# Altium PCB Boost convertor.PcbDoc
Units mil, origin at the board's own origin, x right, y up, seen from the top; angles counter-clockwise.
Board outline 1645 x 1100 mil, 2 copper layers (Top Layer, Bottom Layer); 7 components, 4 nets, 15 pads, 0 vias.
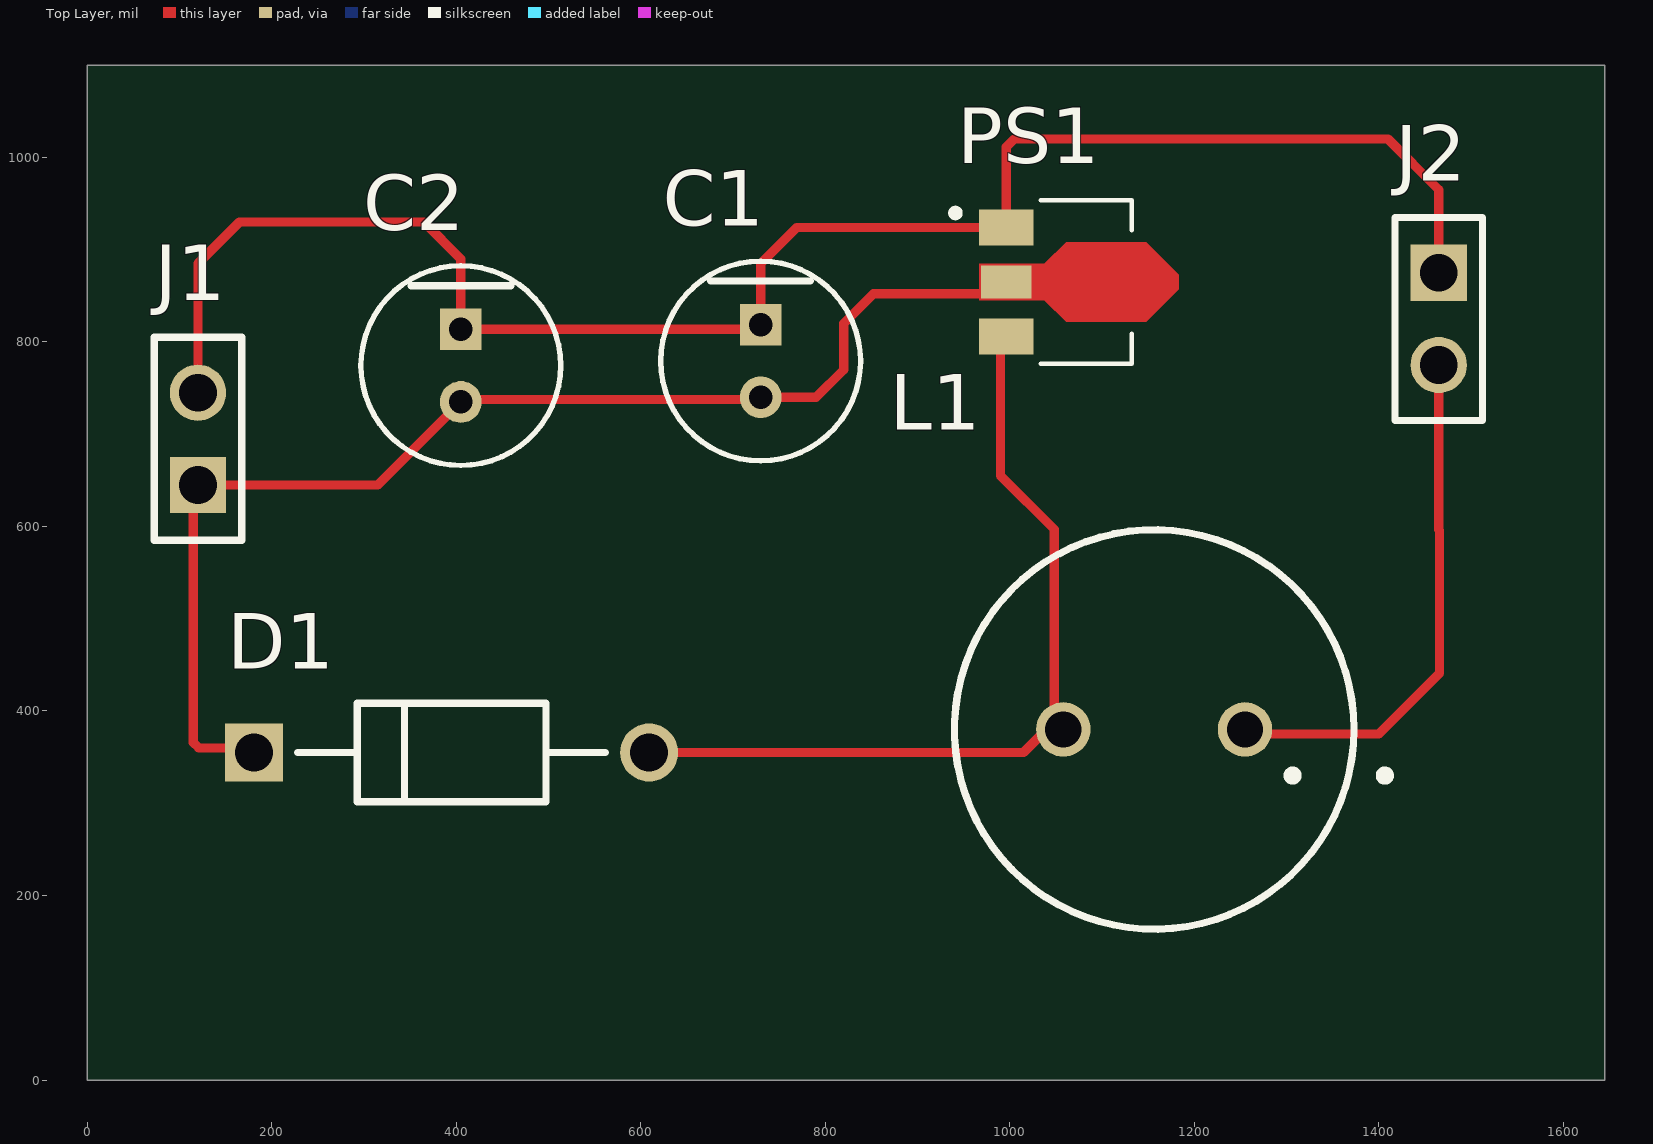
[diagram p0: Top Layer view]
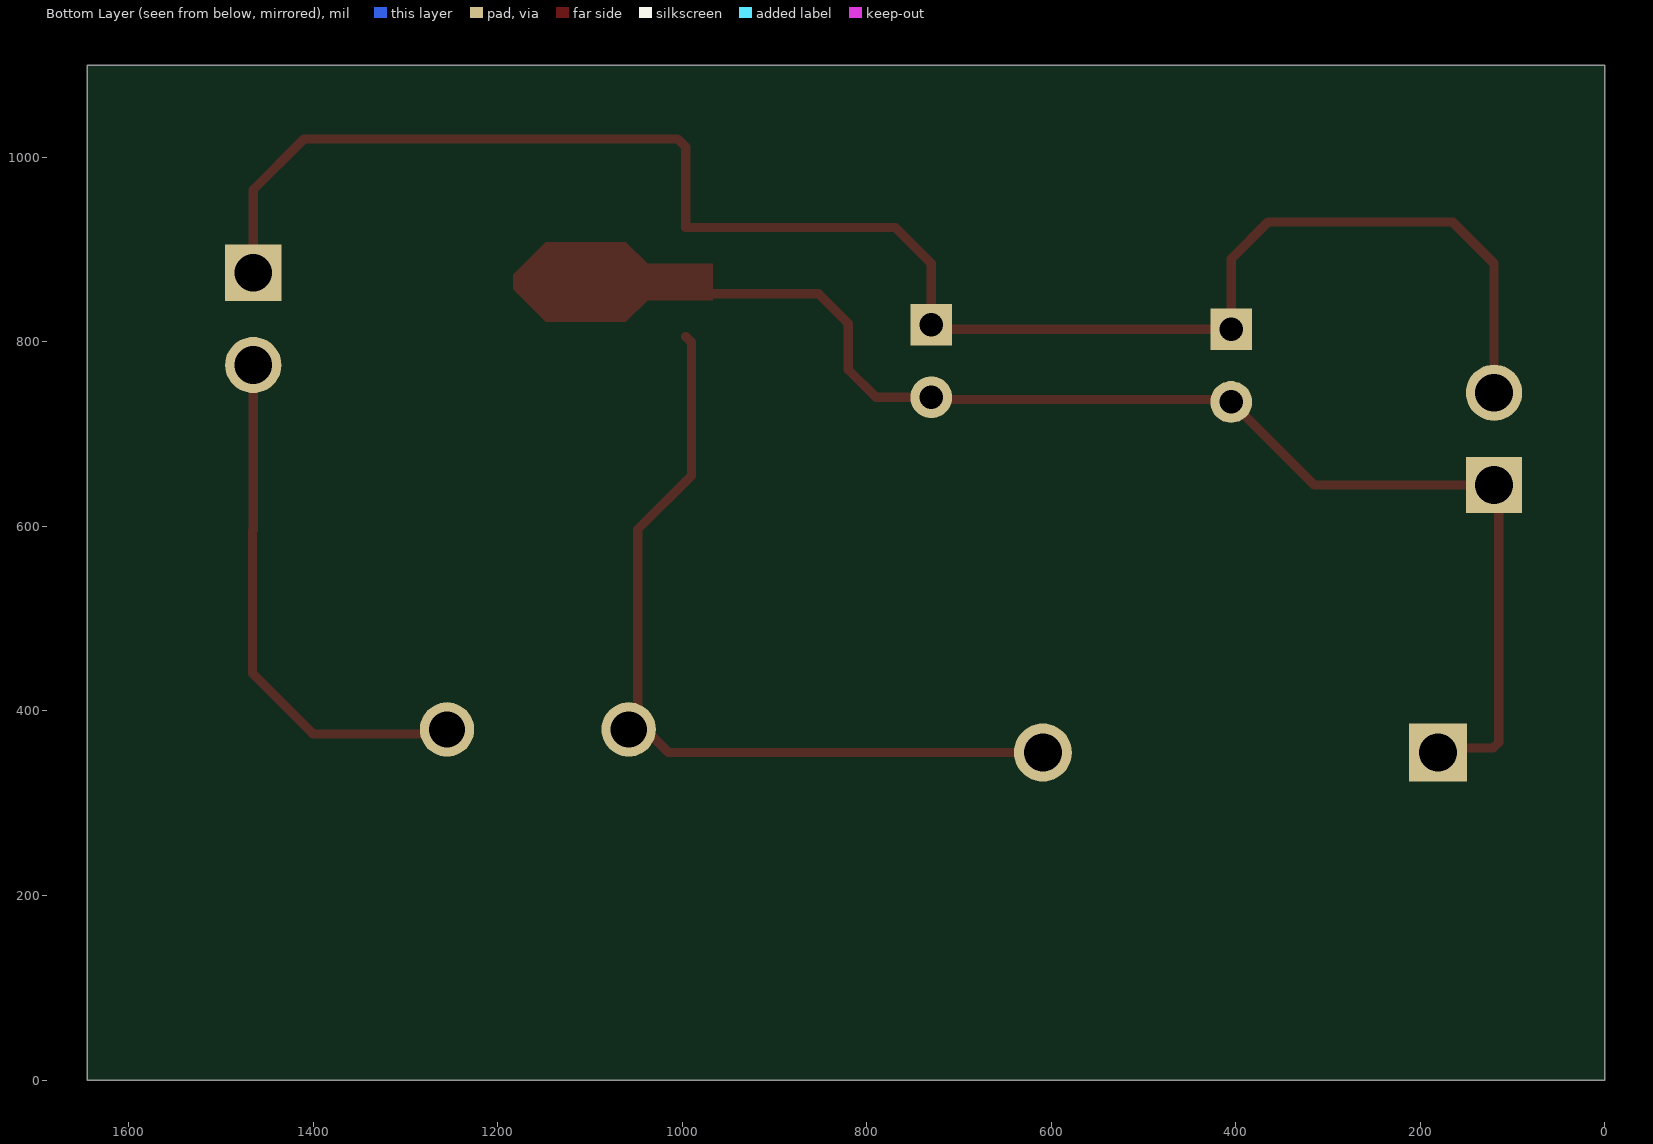
[diagram p1: Bottom Layer view, seen from below]
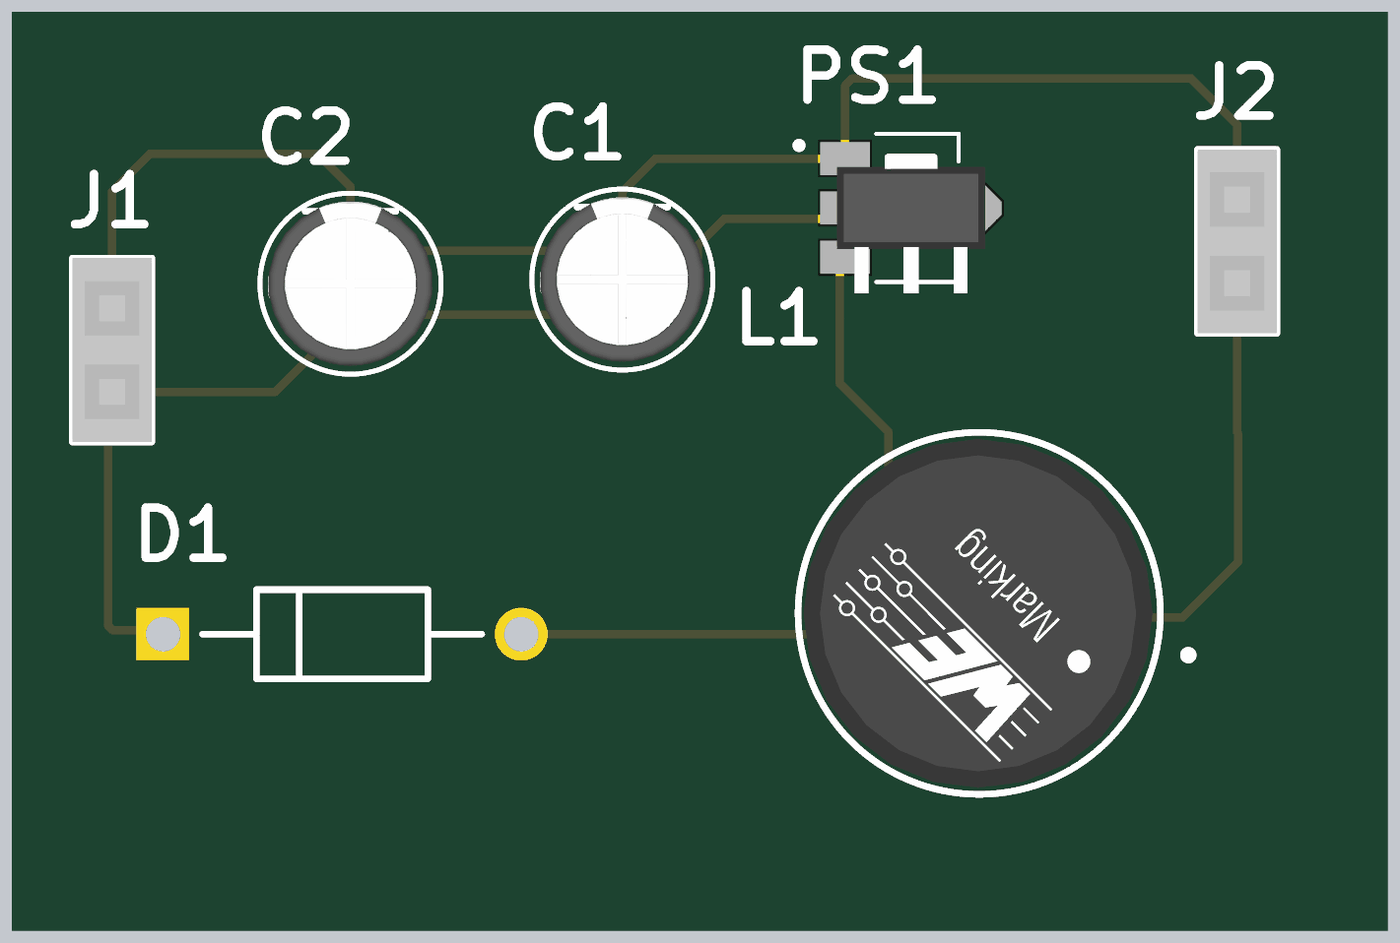
[diagram p2: 3D render of the assembled board from above, using the file's embedded part models]

## Layer stack, top to bottom
Top Solder: solder mask 0.4, Solder Resist, Dk 3.5
Top Layer: signal copper 1.4
Dielectric 1: dielectric 12.6, FR-4, Dk 4.8
Bottom Layer: signal copper 1.4
Bottom Solder: solder mask 0.4, Solder Resist, Dk 3.5

## Board outline
0,0 1645,0 1645,1100 0,1100

## Design rules (kind name [scope] priority, off if disabled: settings)
Clearance [All] p1: gap=10 ignorepadtopadclearanceinfootprint=FALSE except(0: Arc-Hole Track-Hole SMDPad-Hole THPad-Hole Via-Hole Fill-Hole Poly-Hole Region-Hole Text-Hole)
PolygonConnect [All] p1: connectstyle=Relief reliefconductorwidth=10 reliefentries=4 polygonreliefangle="90 Angle" airgapwidth=10
RoutingVias [All] p1: holewidth=28 width=50 viastyle="Through Hole" minholewidth=28 minwidth=50 maxholewidth=28 maxwidth=50
SolderMaskExpansion [All] p1: expansion=4 istentingtop=FALSE
Width [All] p1: maxlimit=10 minlimit=10 preferedwidth=10
30 further rules are at their usual default settings.

## Components (designator, comment, footprint, x,y, rotation, side; value= is the part's Value field where it differs from the comment)
C1 "12uF" FP-RAD-TH-D_5_0_5-L_7_1-F-MFG 730,779.37 r270 top
C2 "12uF" FP-RAD-TH-D_5_0_5-L_7_1-F-MFG 405,774.37 r270 top
D1 "Schottky Diode" FP-DO-41-MFG 395,355 r0 top
J1 "SSW-102-02-T-S" SMTC-SSW-102-02-X-S 120,645 r90 top
J2 "SSW-102-02-T-S" SMTC-SSW-102-02-X-S 1465,875 r270 top
L1 "22uH" "WE-TIS 1111" 1156.57,380 r180 top
PS1 "ME2108A33P" CONV_ME2108A33P 1075,865 r0 top

## Footprints (in the part's own frame and the unit in brackets; to place one, negate y for a bottom-side part, rotate by r counter-clockwise, add the part's x,y. Pads: shape width x height; smd on the part's side, far side on the other; paste and mask are expansions set on the pad)
CONV_ME2108A33P [mm]
  rect 1.5x1 smd mask+0: 1(-2,1.5) 3(-2,-1.5)
  rect 1.4x0.9 smd paste-2 mask+0: 2(-2,0)
  Top Layer region: 2.75,0.2 2.75,-0.2 1.85,-1.1 -0.35,-1.1 -0.95,-0.5 -2.75,-0.5 -2.75,0.5 -0.95,0.5 -0.35,1.1 1.85,1.1
  silkscreen extent -3.5,-2.25 1.45,2.25, body extent -2.25,-2.6 2.25,1.65, height 1.6
FP-DO-41-MFG [mm]
  rect 1.6x1.6 hole 1.05 paste-1000 mask+0: 1(-5.438,0)
  round 1.6 hole 1.05 paste-1000 mask+0: 2(5.438,0)
  silkscreen extent -4.24,-1.36 4.24,1.36
FP-RAD-TH-D_5_0_5-L_7_1-F-MFG [mm]
  rect 1.15x1.15 hole 0.65 paste-1000 mask+0: 1(-1,0)
  round 1.15 hole 0.65 paste-1000 mask+0: 2(1,0)
  silkscreen extent -2.75,-2.75 2.75,2.75, body extent -2.85,-2.85 2.85,2.85, height 0.25
SMTC-SSW-102-02-X-S [mm] "SQ Post Socket, 1x2 Pins, Vertical, 2.54mm Pitch, Female"
  rect 1.55x1.55 hole 1.04: 1(0,0)
  round 1.55 hole 1.04: 2(2.54,0)
  silkscreen extent -1.53,-1.2 4.07,1.2, body extent -1.52,-1.21 4.06,1.21, height 8.51
"WE-TIS 1111" [mm] "THT, 2-Leads, Body 11,0x11,0mm, Pitch 5mm"
  round 1.5 hole 1: 1(-2.5,0) 2(2.5,0)
  silkscreen extent -6.48,-5.5 5.5,5.5, body extent -7.46,-7.5 7.53,7.5, height 10.5

## Part data
C1 C2: library part CMP-05427-000166-1, "Aluminum Electrolytic Capacitors (Radial Lead Type) AEC-Q200 Qualified 12uF ±20% 35V", Case/Package=Radial, ESR (Equivalent Series Resistance)=950mR, Leakage Current=3uA, Max Operating Temperature=105°C, Min Operating Temperature=-55°C, Package Quantity=200, Ripple Current=120mA, Tolerance=20%, Voltage=35V, Capacitance=12uF, Construction=RADIAL, Diameter=5mm, Height=7mm, Height - Seated (Max)=0.315inch, Impedance=950mR, Lead Diameter=0.45mm, Lead Pitch=2mm, Length=7mm, Life (Hours)=1000Hour, Mount="Through Hole", Packaging=Bulk, Radiation Hardening=No, RoHS Compliant=Yes, Series=FC, Termination=Radial, Voltage Rating=35V, Voltage Rating (DC)=35V
D1: library part CMP-12187-000037-1, "DIODE SCHOTTKY 20V 1A DO41", Average Rectified Current=1A, Capacitance=110pF, Case/Package=DO-41, Forward Voltage=450mV, Max Forward Surge Current (Ifsm)=25A, Max Operating Temperature=150°C, Max Repetitive Reverse Voltage (Vrrm)=20V, Max Reverse Current=500uA, Min Operating Temperature=-65°C, Package Quantity=2000, Current Rating=1A, Element Configuration=Single, Forward Current=1A, Height=2.7mm, Lead Free="Lead Free", Length=5.2mm, Max Reverse Leakage Current=500uA, Max Reverse Voltage (DC)=20V, Max Surge Current=25A, Mount="Through Hole", Number of Pins=2, Output Current=1A, Packaging="Cut Tape", Peak Non-Repetitive Surge Current=25A, Polarity=Standard, Radiation Hardening=No, REACH SVHC="No SVHC", RoHS Compliant=Yes, Series=-, Voltage Rating (DC)=20V, Weight=0.01lb, Width=2.7mm
J1 J2: library part CMP-1023-00323-1, "SQ Post Socket, Through-hole, Vertical, -55 to 105 degC, 2.54 mm Pitch, 2-Pin, Female, RoHS", Manufacturer=Samtec, Temperature Range="-55 to 105 degC", ComponentLink1Description="Manufacturer URL", ComponentLink1URL=http://www.samtec.com, ComponentLink2Description=Datasheet, ComponentLink2URL=http://www.samtec.com/documents/webfiles/pdf/SSW_TH.PDF, ComponentLink3Description="Package Specification", ComponentLink3URL=http://www.samtec.com/documents/webfiles/cpdf/SSW-1XX-XX-XXX-X-XX-XXX-XX-MKT.pdf, DatasheetVersion=F-214, Mounting Technology=Through-hole, Orientation=Vertical, PackageDescription="Assembly, Socket Strip .016 X .031 Tail", PackageReference=SSW-102-02-X-S, PackageVersion="CA, 6/1987", PartNumber=SSW-102-02-T-S, Pitch="2.54 mm", RoHS=True
L1: library part CMP-1406-00020-1, "Shielded Radial Leaded Wire Wound Inductor WE-TIS, L=22.0 µH", Inductance="22.0 ÂµH", Manufacturer="Wuerth Elektronik", PartNumber=7447471220, ComponentLink1Description="Manufacturer URL", ComponentLink1URL=http://www.we-online.com, ComponentLink2Description=Datasheet, ComponentLink2URL=http://www.we-online.de/katalog/media/pdf/7447471220.pdf, PackageReference="WE-TIS 1111"
PS1: "PFM Step-up Step-up Step-up Step-up DC/DC Converter", Package=Package, Availability=Unavailable, Check_prices=https://www.snapeda.com/parts/ME2108A33P/Nanjing%20Micro%20One%20Electronics/view-part/4258047/?ref=eda, MF="Nanjing Micro One Electronics", MP=ME2108A33P, Price=None, SnapEDA_Link=https://www.snapeda.com/parts/ME2108A33P/Nanjing%20Micro%20One%20Electronics/view-part/4258047/?ref=snap

## Nets (pads, with @x,y where several pads share a name; then routed paths per layer and width w, separated by ;. In a path a pad name is that pad's centre, name@x,y a point inside that pad or via, vN(x,y) a via of type N, cw(c..) or ccw(c..) an arc to the next point about the centre after c; other vN are vias at no path point)
+3.7V: J2.2 L1.1 | length 582.6
  Top Layer w10: L1.1@1245,375 1400,375 1465.86,440.86 1465.86,595.72 1465,596.57 J2.2
GND: C1.1 C2.1 J1.2 J2.1 PS1.1 | length 1884.6
  Top Layer w10: J1.2 120,885 165,930 365,930 405,890 C2.1 725,813.74 C1.1 730,885 769.06,924.06 PS1.1 996.26,1011.26 1005,1020 1410,1020 1465,965 J2.1
NetD1_2: D1.2 L1.2 PS1.3 | length 905
  Top Layer w10: D1.2 1014.88,355 1034.88,375 1048.15,375 1048.15,596.85 990,655 990,799.69 PS1.3
"USB PORT": C1.2 C2.2 D1.1 J1.1 PS1.2 | length 1348.3
  Top Layer w10: D1.1 175.91,360 120.86,360 115,365.86 115,640 J1.1 315,645 C2.2 407.5,737.5 727.5,737.5 C1.2 790,740 820,770 820,820 852.28,852.28 983.54,852.28 PS1.2